# EAGLE board bb2 (EAGLE 6.5.0)
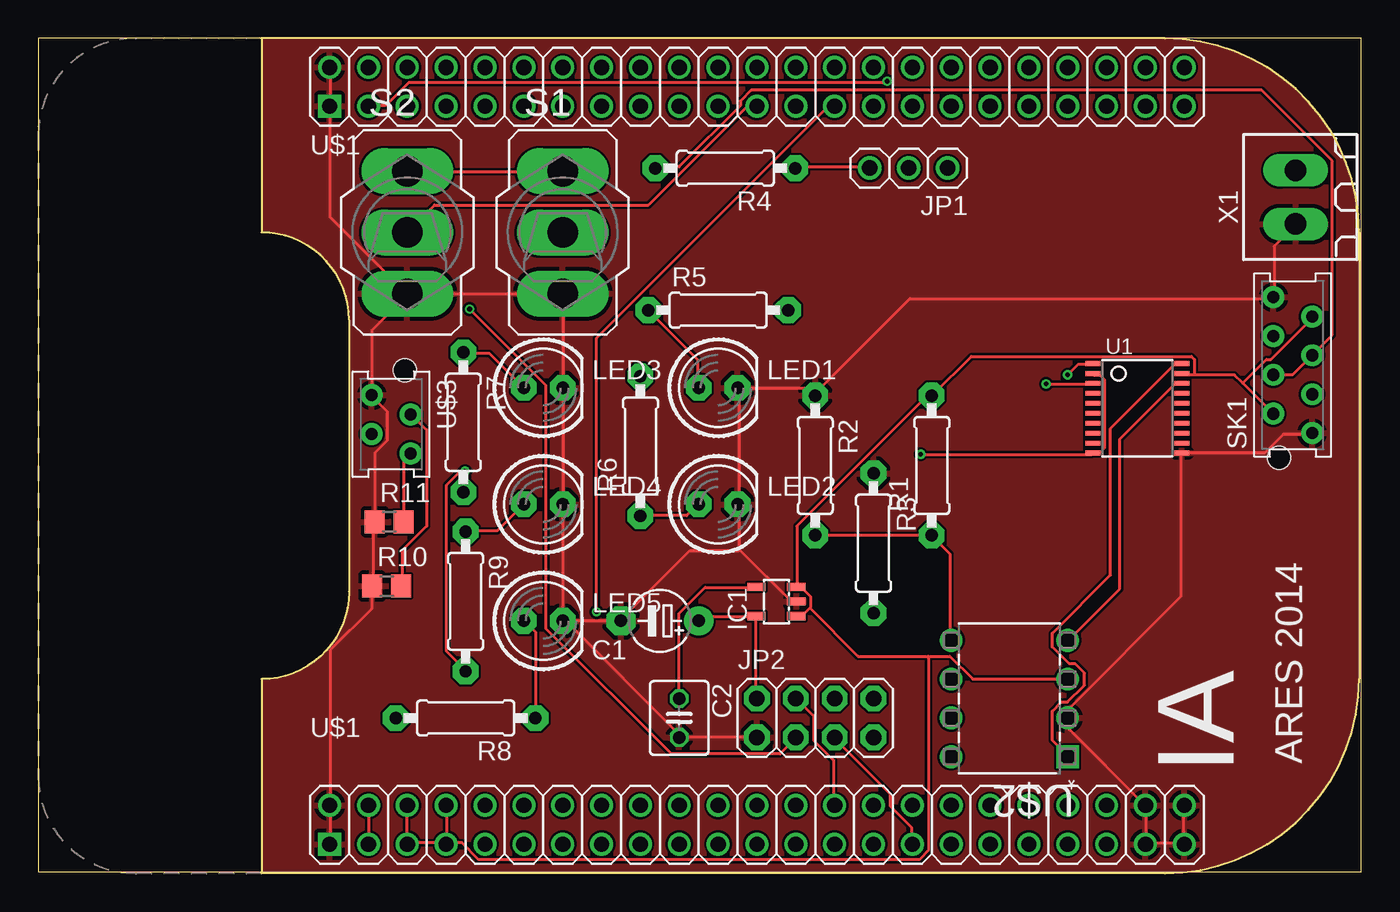
[diagram p0: board, top side]
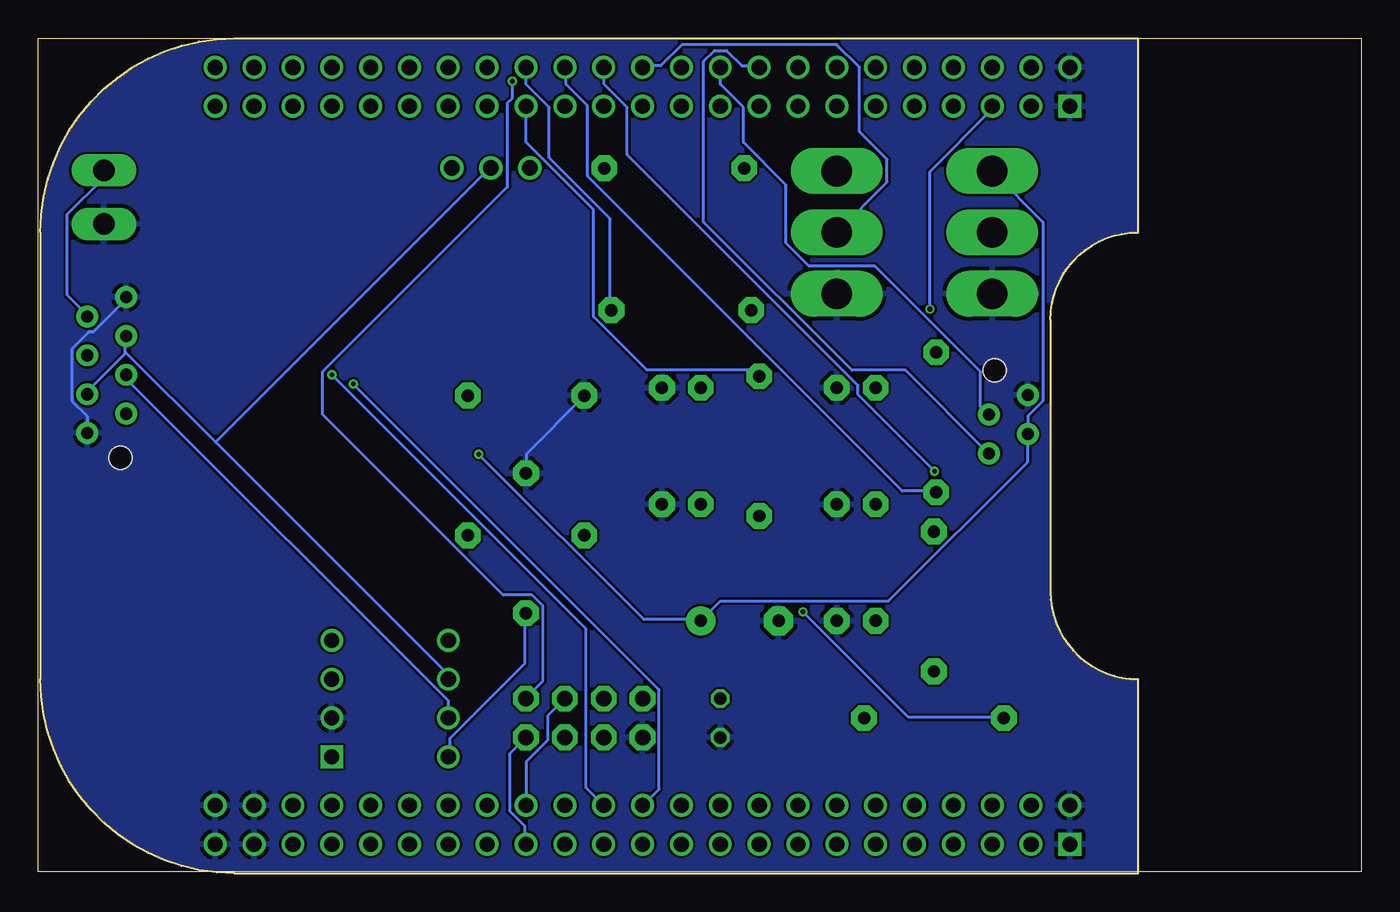
[diagram p1: board, bottom side, seen from below]

Size 86.5 x 54.5 mm. Coordinates in mm from the lower left corner, seen from the top.
Outline: 0,0 86.5,0 86.5,54.5 0,54.5 0,0
Copper layers (1*16): Top 0.035mm / dielectric 1.6mm / Bottom 0.035mm
Design rules "dipole *": minimum track width 0.2mm, minimum drill 0.3mm, track to track 0.15mm, track to pad 0.15mm, pad to pad 0.15mm, via to via 0.15mm, smd to smd 0.01mm, copper to edge 0.01mm, drill to drill 0.01mm, minimum pad ring 0.15mm, minimum via ring 0.15mm, stop-mask expansion 1mil, vias tented up to drill 0mil, thermal gap 10mil

## Footprints (pad centres in the part's own frame; a part is rotated, then mirrored left to right if it is on the bottom)
E5-4 = drill 0.813 pad 1.905: + -2.54,0 | drill 0.813 pad 1.905 octagon: - 2.54,0
C025-040X050 = drill 0.813 octagon: 1 -1.27,0; 2 1.27,0
SOT23-5 = smd 0.55 x 1.2: 1 -0.95,-1.3; 2 0,-1.3; 3 0.95,-1.3; 4 0.95,1.3; 5 -0.95,1.3
1X03 = drill 1.016: 1 -2.54,0; 2 0,0; 3 2.54,0
2X04 = drill 1.016 pad 1.676 octagon: 1 -3.81,-1.27; 2 -3.81,1.27; 3 -1.27,-1.27; 4 -1.27,1.27; 5 1.27,-1.27; 6 1.27,1.27; 7 3.81,-1.27; 8 3.81,1.27
LED5MM = drill 0.813 pad 1.676 octagon: A -1.27,0; K 1.27,0
0207/9 = drill 0.813 pad 1.676 octagon: 1 -4.572,0; 2 4.572,0
R0805 = smd 1.3 x 1.5: 1 -0.95,0; 2 0.95,0
320-916 = drill 2.007 long: 1 0,4.013; 2 0,0; 3 0,-4.013
AMP-215079-8 = drill 0.8 pad 1.422: 1 0,-1.27; 2 1.27,1.27; 3 2.54,-1.27; 4 3.81,1.27; 5 5.08,-1.27; 6 6.35,1.27; 7 7.62,-1.27; 8 8.89,1.27 | hole 1.5: -1.62,0.905
TSSOP20 = smd 0.305 x 0.991: 1 -2.925,-2.918; 2 -2.275,-2.918; 3 -1.625,-2.918; 4 -0.975,-2.918; 5 -0.325,-2.918; 6 0.325,-2.918; 7 0.975,-2.918; 8 1.625,-2.918; 9 2.275,-2.918; 10 2.925,-2.918; 11 2.925,2.918; 12 2.275,2.918; 13 1.625,2.918; 14 0.975,2.918; 15 0.325,2.918; 16 -0.325,2.918; 17 -0.975,2.918; 18 -1.625,2.918; 19 -2.275,2.918; 20 -2.925,2.918
BEAGLEBONE_SHIELD = drill 1 square: 1 4.445,19.05; 47 52.705,19.05 | drill 1: 2 1.905,19.05; 3 4.445,21.59; 4 1.905,21.59; 5 4.445,24.13; 6 1.905,24.13; 7 4.445,26.67; 8 1.905,26.67; 9 4.445,29.21; 10 1.905,29.21; 11 4.445,31.75; 12 1.905,31.75; 13 4.445,34.29; 14 1.905,34.29; 15 4.445,36.83; 16 1.905,36.83; 17 4.445,39.37; 18 1.905,39.37; 19 4.445,41.91; 20 1.905,41.91; 21 4.445,44.45; 22 1.905,44.45; 23 4.445,46.99; 24 1.905,46.99; 25 4.445,49.53; 26 1.905,49.53; 27 4.445,52.07; 28 1.905,52.07; 29 4.445,54.61; 30 1.905,54.61; 31 4.445,57.15; 32 1.905,57.15; 33 4.445,59.69; 34 1.905,59.69; 35 4.445,62.23; 36 1.905,62.23; 37 4.445,64.77; 38 1.905,64.77; 39 4.445,67.31; 40 1.905,67.31; 41 4.445,69.85; 42 1.905,69.85; 43 4.445,72.39; 44 1.905,72.39; 45 4.445,74.93; 46 1.905,74.93; 48 50.165,19.05; 49 52.705,21.59; 50 50.165,21.59; 51 52.705,24.13; 52 50.165,24.13; 53 52.705,26.67; 54 50.165,26.67; 55 52.705,29.21; 56 50.165,29.21; 57 52.705,31.75; 58 50.165,31.75; 59 52.705,34.29; 60 50.165,34.29; 61 52.705,36.83; 62 50.165,36.83; 63 52.705,39.37; 64 50.165,39.37; 65 52.705,41.91; 66 50.165,41.91; 67 52.705,44.45; 68 50.165,44.45; 69 52.705,46.99; 70 50.165,46.99; 71 52.705,49.53; 72 50.165,49.53; 73 52.705,52.07; 74 50.165,52.07; 75 52.705,54.61; 76 50.165,54.61; 77 52.705,57.15; 78 50.165,57.15; 79 52.705,59.69; 80 50.165,59.69; 81 52.705,62.23; 82 50.165,62.23; 83 52.705,64.77; 84 50.165,64.77; 85 52.705,67.31; 86 50.165,67.31; 87 52.705,69.85; 88 50.165,69.85; 89 52.705,72.39; 90 50.165,72.39; 91 52.705,74.93; 92 50.165,74.93
DIP254P762X432-8 = drill 0.991 square: 1 -7.62,7.62 | drill 0.991: 2 -7.62,5.08; 3 -7.62,2.54; 4 -7.62,0; 5 0,0; 6 0,2.54; 7 0,5.08; 8 0,7.62
AMP-215079-4 = drill 0.8 pad 1.422: 1 0,0; 2 1.27,2.54; 3 2.54,0; 4 3.81,2.54 | hole 1.5: -1.62,2.175
180G-2 = drill 1.422 long: 1 -1.75,0; 2 1.75,0

## Placement (x,y rotation side)
C1  2.2u  [E5-4]  40.64,16.41 180 top
C2  470p  [C025-040X050]  41.91,10.06 270 top
IC1  MIC5219BM5  [SOT23-5]  48.26,17.68 90 top
JP1  [1X03]  56.91,46.02 180 top
JP2  [2X04]  50.8,10.06 0 top
LED1  [LED5MM]  44.45,31.65 0 top
LED2  [LED5MM]  44.45,24.03 0 top
LED3  [LED5MM]  33.02,31.65 0 top
LED4  [LED5MM]  33.02,24.03 0 top
LED5  [LED5MM]  33.02,16.41 0 top
R1  47k  [0207/9]  58.42,26.57 90 top
R2  47k  [0207/9]  50.8,26.57 270 top
R3  4.7k  [0207/9]  54.61,21.49 270 top
R4  120  [0207/9]  44.92,46.01 180 top
R5  47k  [0207/9]  44.45,36.73 0 top
R6  47k  [0207/9]  39.37,27.84 90 top
R7  47k  [0207/9]  27.79,29.4 270 top
R8  47k  [0207/9]  27.94,10.06 180 top
R9  47k  [0207/9]  27.94,17.68 270 top
R10  10k  [R0805]  22.78,18.69 0 top
R11  10k  [R0805]  22.95,22.88 0 top
S1  [320-916]  34.29,41.81 0 top
S2  [320-916]  24.13,41.81 0 top
SK1  [AMP-215079-8]  82.02,28.69 90 top
U1  [TSSOP20]  71.86,30.31 270 top
U$1  BEAGLEBONE_OUTLINE  [BEAGLEBONE_SHIELD]  0,54.51 270 top
U$2  MCP2551-E/P  [DIP254P762X432-8]  59.69,15.14 180 top
U$3  MMATCH-4-  [AMP-215079-4]  21.8,31.17 270 top
X1  [180G-2]  82.21,44.12 90 top

## Library data of the parts
C1 C2 = resistor
IC1 = v-reg-micrel; MF: ALTERA CORPORATION; MPN: MIC5219BM5 TR; OC_FARNELL: 1100656; OC_NEWARK: 09J8939
JP1 JP2 LED1-LED5 R1-R9 U1 U$1 = adafruit
R10 R11 = rcl
S1 S2 = switch
SK1 U$3 = jt-con-micromatch
U$2 = mcp2551; MPN: MCP2551-E/P; OC_FARNELL: 1439745; OC_NEWARK: 69K7603; PACKAGE: DIP-8; SUPPLIER: Microchip
X1 = con-weidmueller-sl35; OC_FARNELL: unknown; OC_NEWARK: unknown

## Nets
AIN0: U$1.85
COULEUR: R11.2 U$1.18 U$3.4
DCAN1_RX: U1.3 U$1.70
DCAN1_TX: U1.1 U$1.72
GND: C1.- C2.2 IC1.2 JP2.1 LED1.K LED2.K LED3.K LED4.K LED5.K R2.1 R3.1 R10.1 R11.1 S1.3 S2.3 SK1.1 SK1.8 U1.11 U$1.1 U$1.2 U$1.47 U$1.48 U$1.89 U$1.90 U$1.91 U$1.92 U$2.2 U$3.1 X1.1
N$1: R1.1 R2.2 U$2.5
N$2: JP1.3 R4.1
N$3: R3.2 U$2.8
N$4: C2.1 IC1.4
N$5: R5.2 U$1.30
N$6: R6.2 U$1.29
N$7: R7.2 U$1.28
N$9: R9.2 U$1.26
N$10: LED5.A R8.1
N$11: S1.2 U$1.24
N$12: S2.2 U$1.23
N$13: R8.2 U$1.27
N$15: JP1.2 SK1.3 SK1.6 U$2.6
N$16: R4.2 SK1.4 SK1.5 U$2.7
N$19: LED2.A R6.1
N$20: LED1.A R5.1
N$21: LED3.A R7.1
N$22: LED4.A R9.1
RXD: U1.18 U$2.4
SPI_CE: JP2.3 U$1.5
SPI_CS: JP2.4 U$1.74
SPI_IRQ: JP2.8 U$1.3
SPI_MISO: JP2.7 U$1.75
SPI_MOSI: JP2.6 U$1.76
SPI_SCLK: JP2.5 U$1.77
TIRETTE: R10.2 U$1.20 U$3.2
TXD: U1.20 U$2.1
VDD: IC1.1 IC1.3 R1.2 SK1.2 SK1.7 U1.19 U$1.51 U$1.52 U$1.53 U$1.54 U$2.3 X1.2
VDD_3V3: C1.+ IC1.5 JP2.2 S1.1 S2.1 U1.2 U1.10 U$3.3
VDD_3V3EXP: U$1.49 U$1.50

## Tracks (layer width: path | path; a pad name or v marks a point on that pad's centre or on a via)
COULEUR
  Top 0.2: R11.2 23.9,26.9 24.3,27.3 U$3.4
  Bottom 0.2: U$1.18 39.4,52.7 40.5,52.7 41.5,53.7 42.3,53.7 43,53 43,42.5 33.3,32.8 29.8,32.8 24.4,27.4 U$3.4
DCAN1_RX  (via drill 0.3)
  Top 0.2: v65.9,31.9 68.9,31.9 U1.3
  Bottom 0.2: v65.9,31.9 45.9,11.9 45.9,5.4 46.9,4.4 U$1.70
DCAN1_TX  (via drill 0.3)
  Top 0.2: v67.3,32.5 68,33.2 68.9,33.2 U1.1
  Bottom 0.2: v67.3,32.5 50.7,15.9 50.7,5.5 49.6,4.4 U$1.72
GND
  Top 0.2: U$1.92 74.9,4.3 74.9,2 U$1.91 74.9,1.9 72.5,1.9 U$1.89 72.4,1.9 72.4,4.3 U$1.90 72.3,4.4 67.4,9.3 67.4,10 U$2.2 67.4,10.1 67.4,10.7 74.7,18 74.7,27.3 U1.11 74.8,27.4 80.2,27.4 81.4,28.6 83.2,28.6 SK1.1 | X1.1 82.2,42.3 80.8,40.9 80.8,37.6 SK1.8 80.7,37.5 57,37.5 50.8,31.3 R2.1 50.8,31.2 50.4,31.6 45.8,31.6 LED1.K 45.8,31.5 45.8,24.1 LED2.K 45.8,24 45.8,21.1 45.85,21.05 | 45.85,21.05 49.2,17.7 49.5,17.7 IC1.2 | JP2.1 46.9,8.8 42,8.8 C2.2 42,8.9 34.5,16.4 | 34.5,16.4 C1.- 38.1,16.5 42.6,21 45.8,21 45.85,21.05 | 34.5,16.4 LED5.K | 34.5,16.4 LED5.K | LED5.K 34.3,16.5 34.3,24 LED4.K 34.3,24.1 34.3,31.6 LED3.K 34.3,31.7 34.3,37.7 S1.3 34.2,37.8 24.2,37.8 S2.3 | U$1.2 19.1,52.6 19.1,50.1 U$1.1 19.1,50 19.1,42.8 24.1,37.8 S2.3 | U$1.47 19.1,1.9 19.1,4.3 U$1.48 19.1,4.4 19.1,14.5 21.8,17.2 21.8,18.6 R10.1 21.9,18.7 21.9,22.7 22,22.8 R11.1 22,27.4 22.8,28.2 22.8,30.1 21.8,31.1 U$3.1 21.8,35.4 24.1,37.7 S2.3
  Bottom 0.2: SK1.1 83.3,29.8 84.3,30.8 84.3,34.2 83.2,35.3 82.9,35.3 80.7,37.5 SK1.8 | R3.1 54.6,26.1 54.6,27.3 50.8,31.1 R2.1
  pour Top: -4.8,61 90.3,61 90.3,-4.5 -4.8,-4.5
  pour Bottom: -5.9,64.6 94.8,64.6 94.8,-6.9 -5.9,-6.9
N$1
  Top 0.2: U$2.5 59.6,15.2 59.6,20.8 58.5,21.9 R1.1 58.4,22 R2.2
N$2
  Top 0.2: JP1.3 54.3,46.1 49.5,46.1 R4.1
N$3
  Bottom 0.2: U$2.8 59.6,7.6 59.6,8.7 54.7,13.6 54.7,16.9 R3.2
N$4
  Top 0.2: IC1.4 46.9,18.6 43.6,18.6 41.9,16.9 41.9,11.4 C2.1
N$5
  Bottom 0.2: U$1.30 54.6,51.5 53.1,50 53.1,46.7 49.1,42.7 49.1,36.8 R5.2
N$6
  Bottom 0.2: U$1.29 54.6,50 54.6,47.7 50.2,43.3 50.2,36.3 46.7,32.8 39.7,32.8 39.4,32.5 R6.2
N$7
  Bottom 0.2: U$1.28 52,52.6 52,51.5 50.6,50.1 50.6,45.5 30,24.9 27.8,24.9 R7.2
N$9  (via drill 0.3)
  Top 0.2: v27.9,26.2 27.6,26.2 26.7,25.3 26.7,14.4 27.9,13.2 R9.2
  Bottom 0.2: v27.9,26.2 32.9,31.2 32.9,31.8 48,46.9 48,50 49.5,51.5 49.5,52.6 U$1.26
N$10
  Top 0.2: R8.1 32.5,10.1 32.5,15.7 31.8,16.4 LED5.A
N$11
  Bottom 0.2: S1.2 31,45.1 31,46.6 32.8,48.4 32.8,52.6 34.3,54.1 44.4,54.1 45.8,52.7 46.9,52.7 U$1.24
N$12
  Top 0.2: U$1.23 46.9,50 46.3,50 39.9,43.6 25.9,43.6 24.2,41.9 S2.2
N$13  (via drill 0.3)
  Top 0.2: v36.5,17 36.5,34.9 51.6,50 52,50 U$1.27
  Bottom 0.2: v36.5,17 29.6,10.1 23.4,10.1 R8.2
N$15
  Bottom 0.2: 80.8,34 80.8,33.9 83.2,31.5 83.2,31.3 SK1.3 | 80.8,34 80.8,35 SK1.6 | 80.8,34 74.9,28.1 | 74.9,28.1 59.7,12.9 U$2.6 | 74.9,28.1 57,46 JP1.2
N$16
  Top 0.2: SK1.4 82,32.5 83.2,33.7 SK1.5 83.3,33.8 84.6,35.1 84.6,46.5 80,51.1 46.6,51.1 45.9,50.4 45.9,50.1 41.9,46.1 40.4,46.1 R4.2
  Bottom 0.2: U$2.7 59.7,10.1 59.7,11.2 80.7,32.2 80.7,32.5 SK1.4
N$19
  Top 0.2: R6.1 39.4,23.3 42.4,23.3 43.1,24 LED2.A
N$20
  Top 0.2: LED1.A 43.1,31.7 43.1,33.5 39.9,36.7 R5.1
N$21
  Top 0.2: LED3.A 29.5,33.9 27.8,33.9 R7.1
N$22
  Top 0.2: R9.1 28,22.3 30,22.3 31.7,24 LED4.A
RXD
  Top 0.2: U1.18 74.7,31.9 74.3,31.9 70.7,28.3 70.7,18.5 67.4,15.2 U$2.4
SPI_CE  (via drill 0.3)
  Top 0.2: v28.2,36.8 33.2,31.8 33.2,15.9 41.4,7.7 48.5,7.7 49.5,8.7 JP2.3
  Bottom 0.2: v28.2,36.8 28.2,45.8 24.2,49.8 24.2,50 U$1.5
SPI_CS
  Top 0.2: U$1.74 52,4.4 52,7.3 50.7,8.6 50.7,10.2 49.6,11.3 JP2.4
SPI_IRQ  (via drill 0.3)
  Top 0.2: v55.5,51.7 55.4,51.6 24.2,51.6 22.7,50.1 21.6,50.1 U$1.3
  Bottom 0.2: v55.5,51.7 55.5,50.6 55.8,50.3 55.8,44.8 67.9,32.7 67.9,29.9 56.1,18.1 54.2,18.1 53.5,17.4 53.5,12.5 54.6,11.4 JP2.8
SPI_MISO
  Bottom 0.2: JP2.7 55.7,7.7 55.7,4 54.7,3 54.7,1.9 U$1.75
SPI_MOSI
  Bottom 0.2: JP2.6 53.2,10.2 53.2,8.6 54.6,7.2 54.6,4.4 U$1.76
SPI_SCLK
  Top 0.2: U$1.77 57.1,1.9 57.1,2.9 55.7,4.3 55.7,5.1 52.1,8.7 JP2.5
TIRETTE
  Top 0.2: R10.2 23.8,18.7 23.8,21 25.4,22.6 25.4,28.9 24.4,29.9 U$3.2
  Bottom 0.2: U$1.20 41.9,51.5 40.4,50 40.4,47.7 37.6,44.9 37.6,41.1 36.1,39.6 31.8,39.6 24.9,32.7 24.9,30.4 24.4,29.9 U$3.2
TXD
  Top 0.2: U1.20 74.7,33.2 74.3,33.2 70.1,29 70.1,19.4 66.3,15.6 66.3,14.7 67.4,13.6 67.8,13.6 68.4,13 68.4,12.2 67.3,11.1 66.9,11.1 66.3,10.5 66.3,8.6 67.3,7.6 U$2.1
VDD
  Top 0.2: 75.6,32.5 78.2,32.5 78.75,31.95 | 75.6,32.5 74.8,32.5 U1.19 | 78.75,31.95 80.7,30 SK1.2 | 78.75,31.95 80.3,33.5 80.6,33.5 83.2,36.1 83.2,36.3 SK1.7 | U$1.52 24.1,4.3 24.1,1.9 U$1.51 24.2,1.9 26.6,1.9 U$1.53 | U$1.53 26.7,1.9 26.7,4.3 U$1.54 | 50.45,17.25 50.5,17.3 50.5,18 49.9,18.6 49.6,18.6 IC1.3 49.6,18.7 49.6,22.6 58.1,31.1 58.4,31.1 R1.2 58.5,31.2 61,33.7 75.4,33.7 75.6,33.5 75.6,32.5 | 50.45,17.25 50,16.8 49.6,16.8 IC1.1 | U$2.3 61.1,12.6 59.6,14.1 58.2,14.1 | 58.2,14.1 53.6,14.1 50.45,17.25 | 58.2,14.1 58.2,1.4 57.6,0.8 28.8,0.8 27.7,1.9 26.8,1.9 U$1.53
  Bottom 0.2: X1.2 82.3,45.8 82.3,45.3 84.6,43 84.6,37.7 83.3,36.4 SK1.7
VDD_3V3  (via drill 0.3)
  Top 0.2: S1.1 34.2,45.8 24.2,45.8 S2.1 | U1.2 69,32.5 69.4,32.5 69.7,32.2 69.7,27.7 69.4,27.4 69,27.4 U1.10 68.9,27.3 v57.7,27.3 | C1.+ 43.2,16.5 43.4,16.7 46.9,16.7 IC1.5 46.9,16.6 46.9,11.4 JP2.2
  Bottom 0.2: S2.1 24.1,45.8 20.8,42.5 20.8,30.8 21.8,29.8 U$3.3 21.8,26.8 30.9,17.7 41.9,17.7 43.1,16.5 C1.+ 43.2,16.5 46.9,16.5 v57.7,27.3
VDD_3V3EXP
  Top 0.2: U$1.49 21.6,1.9 21.6,4.3 U$1.50

## Text on the board
tPlace: ARES 2014 | IA